# EAGLE board dummy_Bckup (EAGLE 9.6.2)
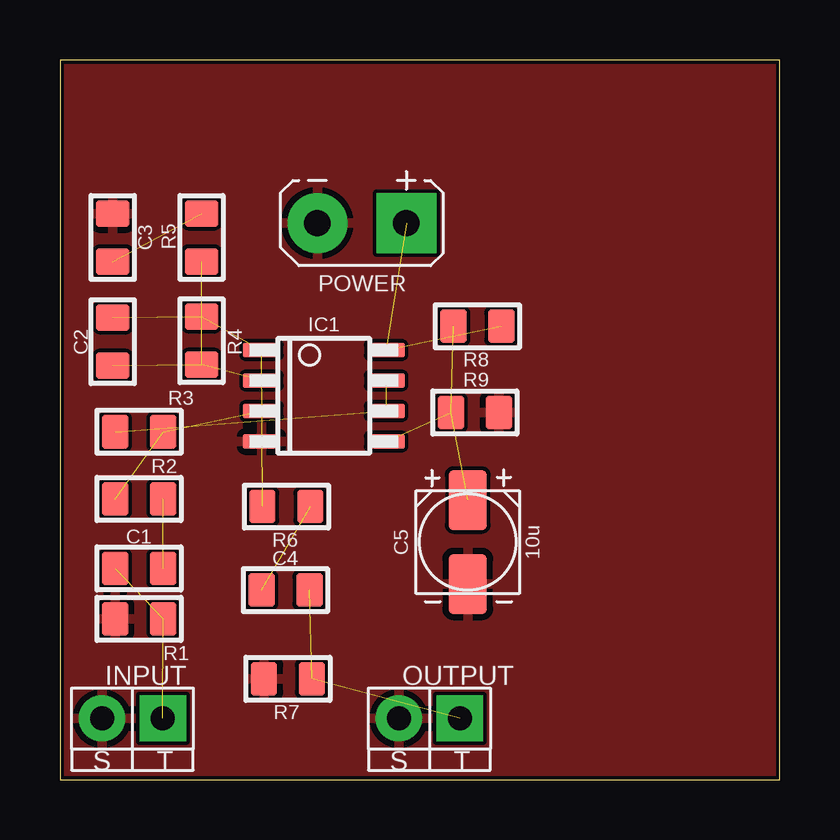
[diagram p0: board, top side]
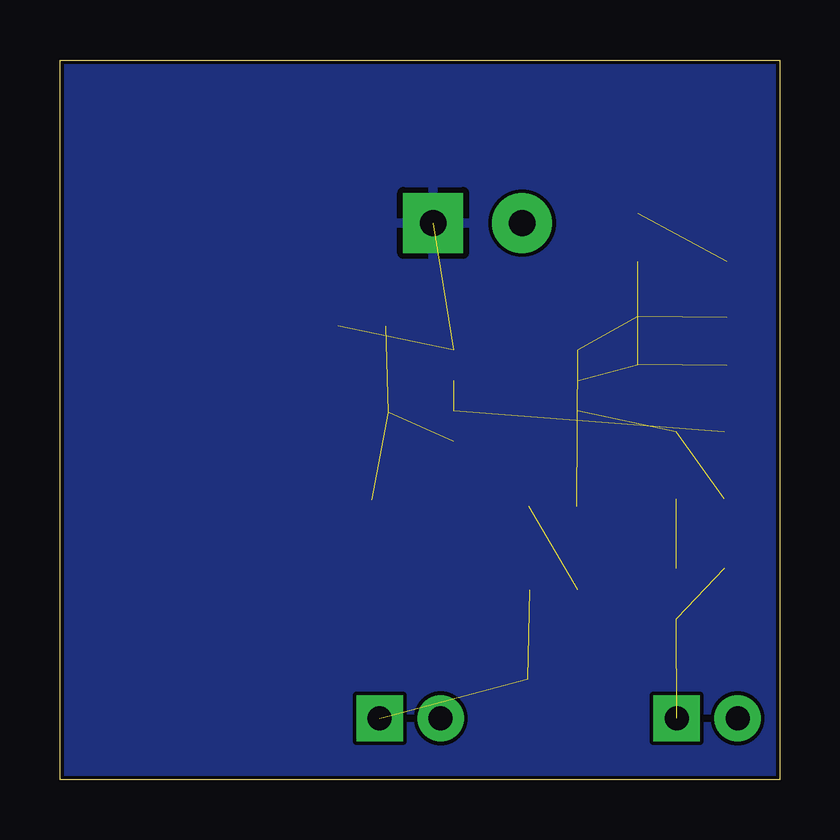
[diagram p1: board, bottom side, seen from below]

Size 30 x 30 mm. Coordinates in mm from the lower left corner, seen from the top.
Outline: 0,0 30,0 30,30 0,30 0,0
Copper layers (1*16): Top 0.035mm / dielectric 1.5mm / Bottom 0.035mm
Design rules "default *": minimum track width 6mil, minimum drill 0.35mm, track to track 6mil, track to pad 6mil, pad to pad 6mil, via to via 6mil, smd to smd 6mil, copper to edge 6mil, drill to drill 6mil, minimum pad ring 10mil, minimum via ring 8mil, stop-mask expansion 4mil, vias tented up to drill 0mil, thermal gap 10mil

## Footprints (pad centres in the part's own frame; a part is rotated, then mirrored left to right if it is on the bottom)
0805 = smd 1.1 x 1.4: 1 -1,0; 2 1,0
4X4.5SMD = smd 1.6 x 2.5: P$1 0,1.75; P$2 0,-1.75
SO08 = smd 1.55 x 0.6: 1 -2.6,1.905; 2 -2.6,0.635; 3 -2.6,-0.635; 4 -2.6,-1.905; 5 2.6,-1.905; 6 2.6,-0.635; 7 2.6,0.635; 8 2.6,1.905
TWO_PADS = drill 1 pad 1.93: S -1.27,0 | drill 1 pad 1.93 square: T 1.27,0
AB9V = drill 1.1 pad 2.5 square: + 1.84,0 | drill 1.1 pad 2.5: - -1.87,0

## Placement (x,y rotation side)
C1  1u  [0805]  3.3,8.8 0 top
C2  100p  [0805]  2.2,18.26 90 top
C3  100p  [0805]  2.2,22.6 270 top
C4  1u  [0805]  9.4,7.9 0 top
C5  10u  [4X4.5SMD]  17,9.9 0 top
IC1  TL072  [SO08]  11,16 0 top
INPUT  generic  [TWO_PADS]  3.02,2.55 0 top
OUTPUT  generic  [TWO_PADS]  15.4,2.55 0 top
POWER  POWERJACK_PADS  [AB9V]  12.6,23.2 0 top
R1  1meg  [0805]  3.3,6.7 0 top
R2  10k  [0805]  3.3,11.7 0 top
R3  1meg  [0805]  3.3,14.5 180 top
R4  100k  [0805]  5.9,18.3 270 top
R5  10k  [0805]  5.9,22.6 90 top
R6  10k  [0805]  9.44,11.38 180 top
R7  100k  [0805]  9.5,4.2 180 top
R8  10k  [0805]  17.4,18.9 180 top
R9  10k  [0805]  17.3,15.3 0 top

## Library data of the parts
C1-C5 = Capacitors
IC1 = OpAmps
INPUT OUTPUT = jacks
POWER = PowerConnectors
R1-R9 = Resistors

## Nets
+9V: IC1.8 POWER.+ R8.1
+VB: IC1.6 IC1.7 R3.2
GND: C3.1 C5.P$2 IC1.4 INPUT.S OUTPUT.S POWER.- R1.1 R7.2 R9.2
N$1: C1.1 INPUT.T R1.2
N$2: C1.2 R2.2
N$3: IC1.3 R2.1 R3.1
N$4: C2.2 IC1.1 R4.1 R6.2
N$5: C2.1 IC1.2 R4.2 R5.1
N$6: C3.2 R5.2
N$8: C4.1 R6.1
N$9: C4.2 OUTPUT.T R7.1
N$10: C5.P$1 IC1.5 R8.2 R9.1

## Tracks (layer width: path | path; a pad name or v marks a point on that pad's centre or on a via)
+9V  (2 unrouted)
  pour Bottom: -5.46,84.93 109.19,84.93 109.19,-8.21 -5.46,-8.21
+VB  (2 unrouted)
GND
  pour Top: -3.59,83.6 108.32,83.6 108.32,-6.56 -3.59,-6.56
N$1  (2 unrouted)
N$2  (1 unrouted)
N$3  (2 unrouted)
N$4  (3 unrouted)
N$5  (3 unrouted)
N$6  (1 unrouted)
N$8  (1 unrouted)
N$9  (2 unrouted)
N$10  (3 unrouted)